# EAGLE board MUXBreakout_v8 (EAGLE 9.7.0)
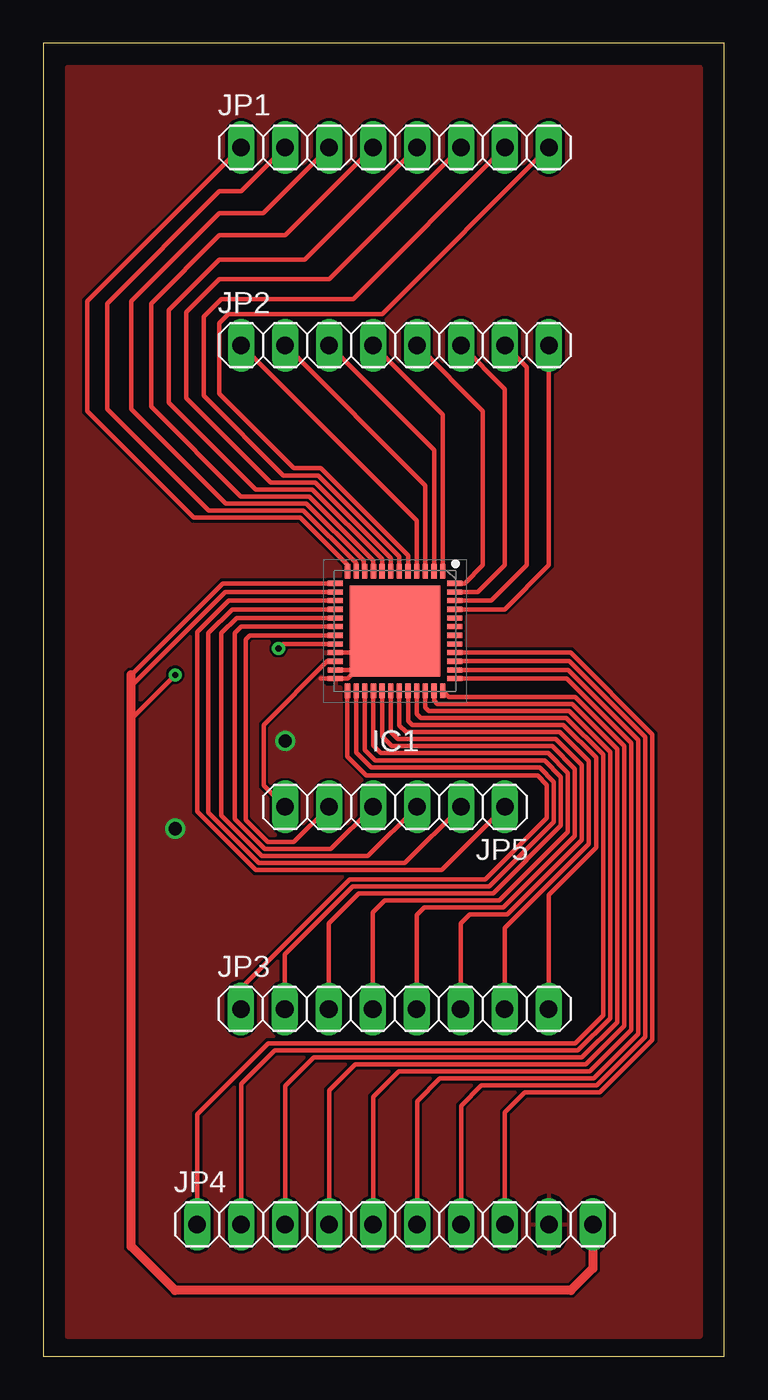
[diagram p0: board, top side]
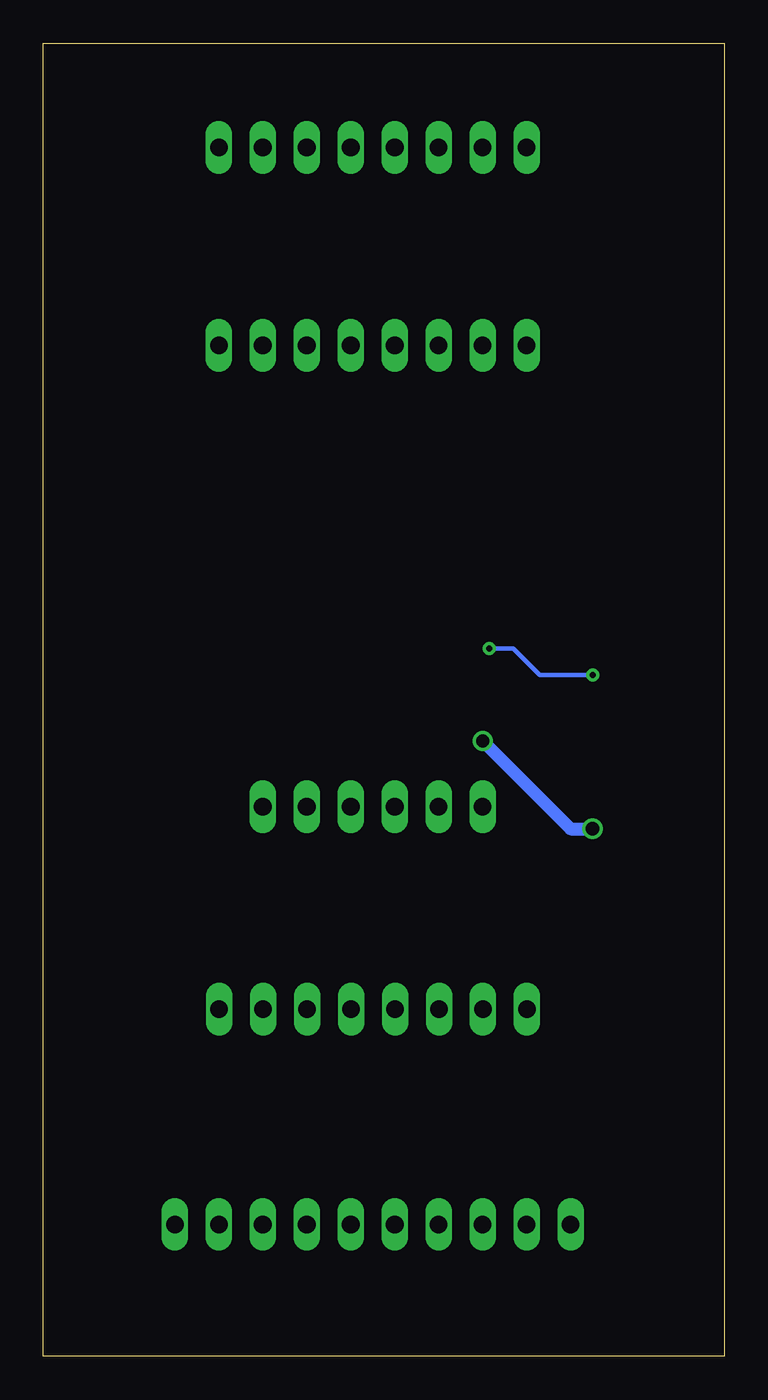
[diagram p1: board, bottom side, seen from below]

Size 39.35 x 75.87 mm. Coordinates in mm from the lower left corner, seen from the top.
Outline: 0,0 39.35,0 39.35,75.87 0,75.87 0,0
Copper layers (1*16): Top / Bottom
Stack-up Default Layer Stack: Top User Defined 0.035mm / Dielectric-1 User Defined 1.5mm / Bottom User Defined 0.035mm
Design rules: minimum copper width 6mil, minimum drill size 0.35mm, copper clearance wire_polygon to wire_polygon 6mil, copper clearance wire_polygon to pad_smd 6mil, copper clearance wire_polygon to via 6mil, copper clearance pad_smd to pad_smd 6mil, copper clearance pad_smd to via 6mil, copper clearance via to via 6mil, copper clearance smd to pad (same net) 6mil, copper clearance smd to via (same net) 6mil, copper clearance smd to smd (same net) 6mil, dimension clearance 40mil, restrict clearance 0mil, drill distance 6mil, keepout clearance 0mil

## Footprints (pad centres in the part's own frame; a part is rotated, then mirrored left to right if it is on the bottom)
QFN50P700X700X100-49N = smd 0.85 x 0.3: 1 -3.45,2.75; 2 -3.45,2.25; 3 -3.45,1.75; 4 -3.45,1.25; 5 -3.45,0.75; 6 -3.45,0.25; 7 -3.45,-0.25; 8 -3.45,-0.75; 9 -3.45,-1.25; 10 -3.45,-1.75; 11 -3.45,-2.25; 12 -3.45,-2.75; 25 3.45,-2.75; 26 3.45,-2.25; 27 3.45,-1.75; 28 3.45,-1.25; 29 3.45,-0.75; 30 3.45,-0.25; 31 3.45,0.25; 32 3.45,0.75; 33 3.45,1.25; 34 3.45,1.75; 35 3.45,2.25; 36 3.45,2.75 | smd 0.3 x 0.85: 13 -2.75,-3.45; 14 -2.25,-3.45; 15 -1.75,-3.45; 16 -1.25,-3.45; 17 -0.75,-3.45; 18 -0.25,-3.45; 19 0.25,-3.45; 20 0.75,-3.45; 21 1.25,-3.45; 22 1.75,-3.45; 23 2.25,-3.45; 24 2.75,-3.45; 37 2.75,3.45; 38 2.25,3.45; 39 1.75,3.45; 40 1.25,3.45; 41 0.75,3.45; 42 0.25,3.45; 43 -0.25,3.45; 44 -0.75,3.45; 45 -1.25,3.45; 46 -1.75,3.45; 47 -2.25,3.45; 48 -2.75,3.45 | smd 5.25 x 5.25: 49 0,0
1X08 = drill 1.016 long: 1 -8.89,0; 2 -6.35,0; 3 -3.81,0; 4 -1.27,0; 5 1.27,0; 6 3.81,0; 7 6.35,0; 8 8.89,0
1X10 = drill 1.016 long: 1 -11.43,0; 2 -8.89,0; 3 -6.35,0; 4 -3.81,0; 5 -1.27,0; 6 1.27,0; 7 3.81,0; 8 6.35,0; 9 8.89,0; 10 11.43,0
1X06 = drill 1.016 long: 1 -6.35,0; 2 -3.81,0; 3 -1.27,0; 4 1.27,0; 5 3.81,0; 6 6.35,0

## Placement (x,y rotation side)
IC1  ADG732BCPZ  [QFN50P700X700X100-49N]  20.32,41.91 270 top
JP1  PINHD-1X8  [1X08]  20.32,69.85 0 top
JP2  PINHD-1X8  [1X08]  20.32,58.42 0 top
JP3  PINHD-1X8  [1X08]  20.3,20.07 0 top
JP4  PINHD-1X10  [1X10]  20.32,7.62 0 top
JP5  PINHD-1X6  [1X06]  20.32,31.75 180 top

## Library data of the parts
IC1 = ADG732BCPZ; DESCRIPTION: ADG732BCPZ, Analogue Switch Single 32:1, 3, 5V, 48-Pin, LFCSP EP; HEIGHT: 1mm; MANUFACTURER_NAME: Analog Devices; MANUFACTURER_PART_NUMBER: ADG732BCPZ; MOUSER_PART_NUMBER: 584-ADG732BCPZ; MOUSER_PRICE-STOCK: https://www.mouser.co.uk/ProductDetail/Analog-Devices/ADG732BCPZ?qs=BpaRKvA4VqHiwXPRyuCIMA%3D%3D
JP1-JP3 = Connector; CATEGORY: Headers; DESCRIPTION: Header, Straight, 8 Position; MANUFACTURER: Generic; MPN: Generic; OPERATING_TEMPERATURE: Generic; PART_STATUS: Active; PITCH: 0.100" (2.54mm); ROHS_COMPLIANCE: Generic; SERIES: Generic; SUB-CATEGORY: Headers, Male Pins; TYPE: Board to Board or Cable, Unshrouded, Through Hole, Straight
JP4 = Connector; CATEGORY: Headers; DESCRIPTION: Header, Straight, 10 Position; MANUFACTURER: Generic; MPN: Generic; OPERATING_TEMPERATURE: Generic; PART_STATUS: Active; PITCH: 0.100" (2.54mm); ROHS_COMPLIANCE: Generic; SERIES: Generic; SUB-CATEGORY: Headers, Male Pins; TYPE: Board to Board or Cable, Unshrouded, Through Hole, Straight
JP5 = Connector; CATEGORY: Headers; DESCRIPTION: Header, Straight, 6 Position; MANUFACTURER: Generic; MPN: Generic; OPERATING_TEMPERATURE: Generic; PART_STATUS: Active; PITCH: 0.100" (2.54mm); ROHS_COMPLIANCE: Generic; SERIES: Generic; SUB-CATEGORY: Headers, Male Pins; TYPE: Board to Board or Cable, Unshrouded, Through Hole, Straight

## Nets
!EN: IC1.22 JP5.6
A0: IC1.15 JP5.1
A1: IC1.16 JP5.2
A2: IC1.17 JP5.3
A3: IC1.18 JP5.4
A4: IC1.19 JP5.5
D: IC1.43
GND: IC1.21 IC1.23 IC1.24 IC1.49 JP4.9
NC_1: IC1.41
NC_2: IC1.42
NC_3: IC1.44
S1: IC1.12 JP1.1
S2: IC1.11 JP1.2
S3: IC1.10 JP1.3
S4: IC1.9 JP1.4
S5: IC1.8 JP1.5
S6: IC1.7 JP1.6
S7: IC1.6 JP1.7
S8: IC1.5 JP1.8
S9: IC1.4 JP2.1
S10: IC1.3 JP2.2
S11: IC1.2 JP2.3
S12: IC1.1 JP2.4
S13: IC1.48 JP2.5
S14: IC1.47 JP2.6
S15: IC1.46 JP2.7
S16: IC1.45 JP2.8
S17: IC1.25 JP3.1
S18: IC1.26 JP3.2
S19: IC1.27 JP3.3
S20: IC1.28 JP3.4
S21: IC1.29 JP3.5
S22: IC1.30 JP3.6
S23: IC1.31 JP3.7
S24: IC1.32 JP3.8
S25: IC1.33 JP4.1
S26: IC1.34 JP4.2
S27: IC1.35 JP4.3
S28: IC1.36 JP4.4
S29: IC1.37 JP4.5
S30: IC1.38 JP4.6
S31: IC1.39 JP4.7
S32: IC1.40 JP4.8
VDD_2: IC1.13 IC1.14 IC1.20 JP4.10

## Tracks (layer width: path | path; a pad name or v marks a point on that pad's centre or on a via)
!EN
  Top 0.254: JP5.6 12.73,32.99 12.73,36.49 16.4,40.16 IC1.22
A0
  Top 0.254: JP5.1 23.01,28.09 12.28,28.09 8.89,31.48 8.89,41.84 10.71,43.66 IC1.15
A1
  Top 0.254: IC1.16 10.9,43.16 9.52,41.78 9.52,31.42 12.45,28.5 20.88,28.5 JP5.2
A2
  Top 0.254: IC1.17 11.16,42.66 10.29,41.78 10.29,31.24 12.62,28.91 18.75,28.91 JP5.3
A3
  Top 0.254: IC1.18 11.43,42.16 11.05,41.78 11.05,31.05 12.79,29.31 16.61,29.31 JP5.4
A4
  Top 0.254: JP5.5 14.48,29.72 12.95,29.72 11.68,30.99 11.68,41.41 11.94,41.66 IC1.19
GND  (via drill 0.76)
  Top 0.254: 19.07,40.66 IC1.21 | IC1.23 18.07,39.66 IC1.49 17.57,39.16 16.03,39.16 | IC1.24 16.3,39.16
  Top 0.508: IC1.49 19.07,40.66
  Bottom 0.762: v13.97,35.56 8.89,30.48 v7.62,30.48
  pour Top: 38.08,0 1.27,0 1.27,74.6 38.08,74.6
S1
  Top 0.254: JP1.1 2.54,60.96 2.54,54.61 8.69,48.46 14.85,48.46 17.57,45.74 IC1.12
S2
  Top 0.254: JP1.2 11.43,67.31 10.16,67.31 3.68,60.83 3.68,54.74 9.55,48.87 15.03,48.87 18.07,45.83 IC1.11
S3
  Top 0.254: JP1.3 12.7,66.04 10.16,66.04 5.08,60.96 5.08,54.74 10.54,49.28 15.2,49.28 18.5,45.98 18.5,45.43 IC1.10
S4
  Top 0.254: JP1.4 13.97,64.77 10.16,64.77 6.22,60.83 6.22,54.86 11.41,49.68 15.37,49.68 19.07,45.98 IC1.9
S5
  Top 0.254: JP1.5 15.11,63.37 10.16,63.37 7.24,60.45 7.24,55.12 12.27,50.09 15.54,50.09 19.57,46.05 IC1.8
S6
  Top 0.254: JP1.6 16.51,62.23 10.16,62.23 8.25,60.32 8.25,55.37 13.13,50.49 15.7,50.49 20.07,46.13 IC1.7
S7
  Top 0.254: JP1.7 17.91,61.09 10.29,61.09 9.27,60.07 9.27,55.5 13.87,50.9 15.87,50.9 20.57,46.2 IC1.6
S8
  Top 0.254: JP1.8 19.58,60.22 10.69,60.22 10.16,59.69 10.16,55.63 14.48,51.31 16.04,51.31 21.07,46.28 IC1.5
S9
  Top 0.254: JP2.1 21.57,48.28 IC1.4
S10
  Top 0.254: JP2.2 22.07,50.32 IC1.3
S11
  Top 0.254: JP2.3 22.57,52.36 IC1.2
S12
  Top 0.254: JP2.4 23.07,54.4 IC1.1
S13
  Top 0.254: JP2.5 25.4,54.61 25.4,45.72 24.34,44.66 IC1.48
S14
  Top 0.254: JP2.6 26.67,55.88 26.67,45.72 25.11,44.16 IC1.47
S15
  Top 0.254: JP2.7 27.94,57.15 27.94,45.72 25.88,43.66 IC1.46
S16
  Top 0.254: JP2.8 29.21,45.72 26.65,43.16 IC1.45
S17
  Top 0.254: IC1.25 17.57,34.65 18.67,33.55 28.55,33.55 29.08,33.02 29.08,31.12 25.53,27.56 17.71,27.56 11.41,21.26 JP3.1
S18
  Top 0.254: JP3.2 13.95,23.22 17.88,27.15 25.76,27.15 29.49,30.89 29.49,33.19 28.67,34.01 18.95,34.01 18.07,34.89 IC1.26
S19
  Top 0.254: JP3.3 16.49,25 18.24,26.75 25.98,26.75 29.9,30.66 29.9,33.48 28.96,34.42 19.18,34.42 18.57,35.02 IC1.27
S20
  Top 0.254: JP3.4 19.03,25.63 19.74,26.34 26.34,26.34 30.3,30.3 30.3,33.71 29.16,34.85 19.51,34.85 19.07,35.29 IC1.28
S21
  Top 0.254: JP3.5 21.57,25.51 22,25.93 26.57,25.93 30.71,30.07 30.71,33.93 29.39,35.25 20.12,35.25 19.57,35.8 IC1.29
S22
  Top 0.254: JP3.6 24.11,25 24.64,25.53 26.8,25.53 31.12,29.84 31.12,34.16 29.62,35.66 20.47,35.66 20.07,36.06 IC1.30
S23
  Top 0.254: JP3.7 26.65,24.74 31.52,29.62 31.52,34.39 29.84,36.07 20.96,36.07 20.57,36.45 IC1.31
S24
  Top 0.254: JP3.8 29.19,26.65 31.93,29.39 31.93,34.59 30.05,36.47 21.31,36.47 21.07,36.71 IC1.32
S25
  Top 0.254: JP4.1 8.89,13.97 13,18.09 30.72,18.09 32.33,19.7 32.33,34.76 30.22,36.88 21.79,36.88 21.57,37.1 IC1.33
S26
  Top 0.254: JP4.2 11.43,15.75 13.36,17.68 30.89,17.68 32.74,19.53 32.74,34.93 30.38,37.29 22.28,37.29 22.07,37.49 IC1.34
S27
  Top 0.254: JP4.3 13.97,15.62 15.62,17.27 31.12,17.27 33.15,19.3 33.15,35.1 30.55,37.69 22.76,37.69 22.57,37.88 IC1.35
S28
  Top 0.254: JP4.4 16.51,15.37 18.01,16.87 31.34,16.87 33.55,19.08 33.55,35.27 30.72,38.1 23.43,38.1 IC1.36
S29
  Top 0.254: JP4.5 19.05,14.99 20.52,16.46 31.57,16.46 33.96,18.85 33.96,35.44 30.24,39.16 IC1.37
S30
  Top 0.254: JP4.6 21.59,14.73 22.91,16.05 31.79,16.05 34.37,18.62 34.37,35.6 30.31,39.66 IC1.38
S31
  Top 0.254: JP4.7 24.13,14.48 25.3,15.65 31.96,15.65 34.77,18.46 34.77,35.77 30.38,40.16 IC1.39
S32
  Top 0.254: JP4.8 26.67,14.1 27.81,15.24 32.13,15.24 35.18,18.29 35.18,35.94 30.46,40.66 IC1.40
VDD_2  (via drill 0.35)
  Top 0.254: 5.08,39.37 10.37,44.66 IC1.13 | IC1.14 10.5,44.16 5.08,38.73 | IC1.20 13.86,41.16 v13.59,40.89 | v7.62,39.37 5.08,36.83
  Top 0.508: JP4.10 31.75,5.08 30.48,3.81 7.62,3.81 5.08,6.35 5.08,36.83 5.08,38.73 5.08,39.37
  Bottom 0.254: v13.59,40.89 12.19,40.89 10.67,39.37 v7.62,39.37